# Altium PCB Main.PcbDoc
Units mm, origin at the board's own origin, x right, y up, seen from the top; angles counter-clockwise.
Board outline 46.61 x 26.29 mm, 2 copper layers (Top Layer, Bottom Layer); 17 components, 12 nets, 45 pads, 2 vias.
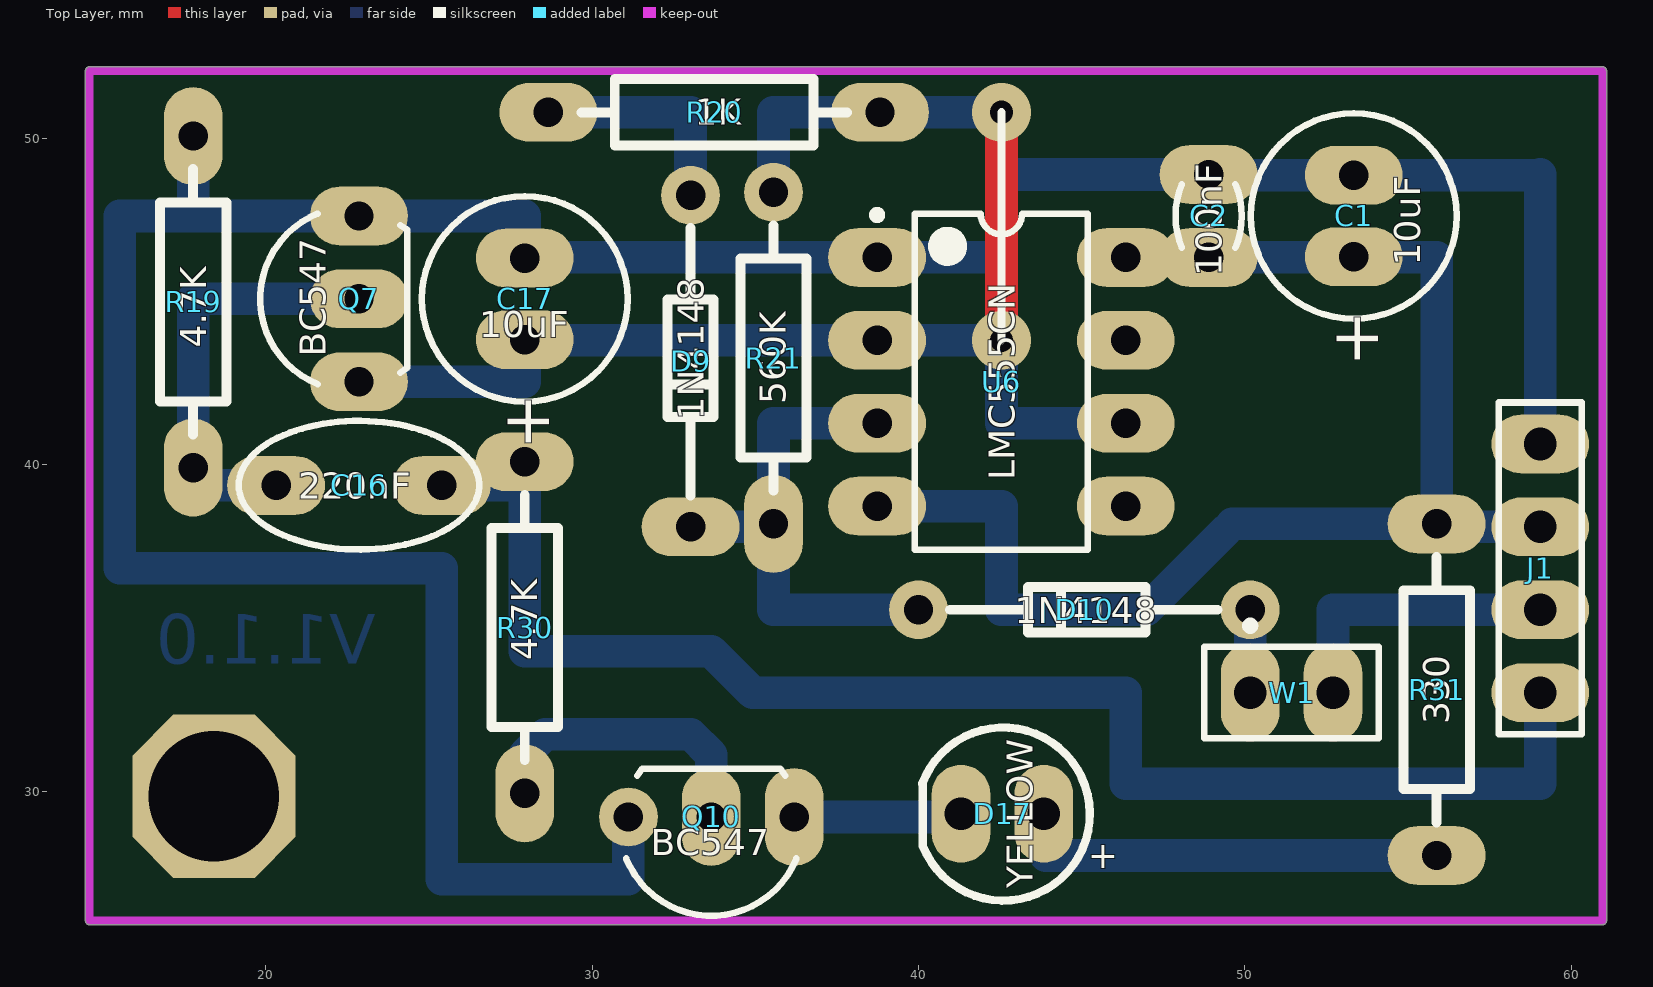
[diagram p0: Top Layer view]
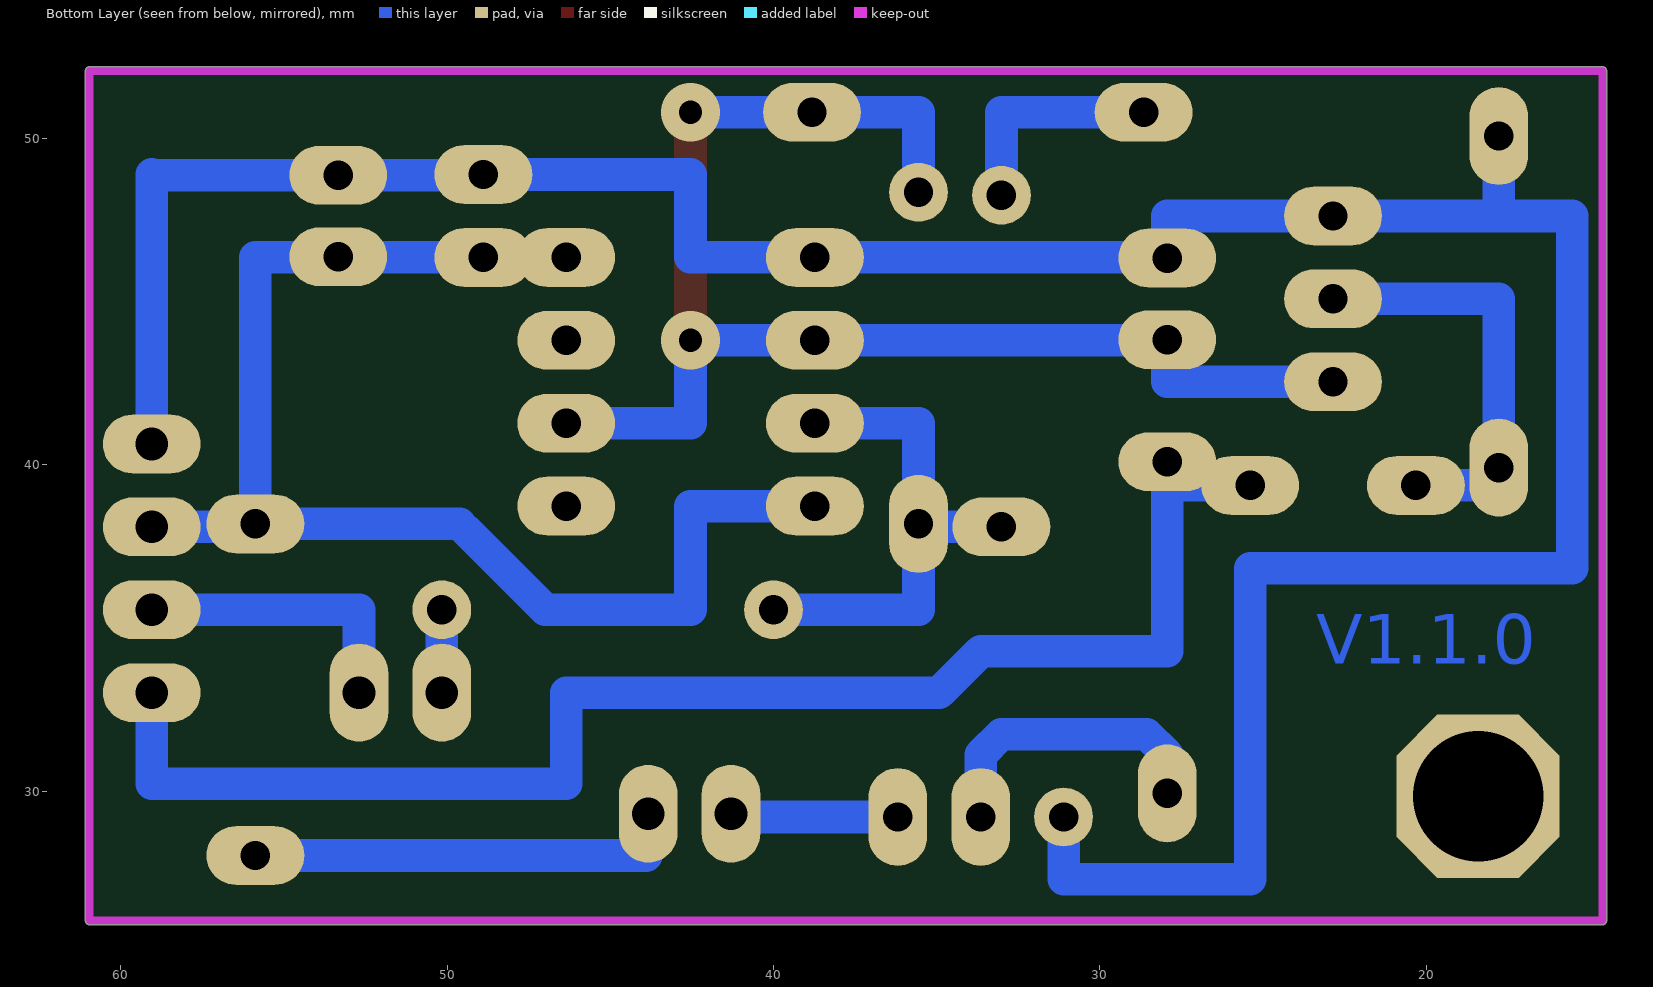
[diagram p1: Bottom Layer view, seen from below]

## Layer stack, top to bottom
Top Solder: solder mask 0.0102, Solder Resist, Dk 3.5
Top Layer: signal copper 0.0356
Dielectric 1: dielectric 0.32, FR-4, Dk 4.8
Bottom Layer: signal copper 0.0356
Bottom Solder: solder mask 0.0102, Solder Resist, Dk 3.5

## Board outline
14.605,25.908 cw(c14.605,26.035) 14.478,26.035 14.478,52.07 cw(c14.605,52.07) 14.605,52.197 60.96,52.197 cw(c60.96,52.07) 61.087,52.07 61.087,26.035 cw(c60.96,26.035) 60.96,25.908

## Design rules (kind name [scope] priority, off if disabled: settings)
Clearance [All] p1: gap=0.3
ComponentClearance [All] p1 off: gap=0 collisioncheckmode=3 verticalgap=0 showdistances=FALSE
Height [All] p1: minheight=0 maxheight=50 prefheight=12.7
PolygonConnect [All] p1: connectstyle=Relief reliefconductorwidth=0.254 reliefentries=4 polygonreliefangle="90 Angle" airgapwidth=0.254
RoomDefinition Main1 [InComponentClass('Main1')] p1: confinementstyle=ConfineIn formatcopy=TRUE lockcomponents=FALSE outline 21.565,30.734 49.759,30.734 49.759,48.006 21.565,48.006
RoutingVias [All] p1: holewidth=0.711 width=1.27 viastyle="Through Hole" minholewidth=0.711 minwidth=1.27 maxholewidth=0.711 maxwidth=1.27
SolderMaskExpansion [All] p1: expansion=0.102
Width [All] p1: maxlimit=0.5 minlimit=0.3 preferedwidth=0.3
28 further rules are at their usual default settings.

## Components (designator, comment, footprint, x,y, rotation, side; value= is the part's Value field where it differs from the comment)
C1 "10uF" CAPPR2.5-6.3x5 53.34,47.625 r90 top
C2 "100nF" CAPNTO2.54-3.56x2.03 48.895,47.625 r270 top
C16 "220nF" CAPNTO5.08-7.37x3.94 22.86,39.37 r180 top
C17 "10uF" CAPPR2.5-6.3x5 27.94,45.085 r90 top
D9 "1N4148" DIODE0.4_Glass#1 33.02,43.18 r270 top
D10 "1N4148" DIODE0.4_Glass#2 45.085,35.56 r180 top
D17 "YELLOW" LED-5mm_Red 42.545,29.21 r180 top
J1 "4PIN" HDR1X4 59.055,40.64 r270 top
Q7 "BC547" TO92C#1 22.86,45.085 r180 top
Q10 "BC547" TO92C#2 33.655,29.21 r270 top
R19 "4.7K" AXIAL-0.4#1 17.78,43.815 r90 top
R20 "1K" AXIAL-0.4#1 34.925,50.8 r180 top
R21 "560K" AXIAL-0.4#2 35.56,44.45 r270 top
R30 "4.7K" AXIAL-0.4#3 27.94,36.195 r270 top
R31 "330" AXIAL-0.4#4 55.88,34.29 r270 top
U6 "LMC555CN" N08E 42.545,42.545 r0 top
W1 "Jumper" PIN2 50.165,33.02 r0 top

## Footprints (in the part's own frame and the unit in brackets; to place one, negate y for a bottom-side part, rotate by r counter-clockwise, add the part's x,y. Pads: shape width x height; smd on the part's side, far side on the other; paste and mask are expansions set on the pad)
AXIAL-0.4#1 [mm]
  oval 3x1.8 hole 0.9: 1(-3.9,0) 2(6.26,0)
  silkscreen extent -2.88,-1.02 5.24,1.02, body extent -4.19,-1.19 6.58,1.12, height 3.51
AXIAL-0.4#2 [mm]
  round 1.8 hole 0.9: 1(-3.9,0)
  oval 3x1.8 hole 0.9: 2(6.26,0)
  silkscreen extent -2.88,-1.02 5.24,1.02, body extent -4.19,-1.19 6.58,1.12, height 3.51
AXIAL-0.4#3 [mm]
  oval 1.8x3 hole 0.9: 1(-3.9,0)
  oval 3x1.8 hole 0.9: 2(6.26,0)
  silkscreen extent -2.88,-1.02 5.24,1.02, body extent -4.19,-1.19 6.58,1.12, height 3.51
AXIAL-0.4#4 [mm]
  oval 1.8x3 hole 0.9: 1(-3.9,0) 2(6.26,0)
  silkscreen extent -2.88,-1.02 5.24,1.02, body extent -4.19,-1.19 6.58,1.12, height 3.51
CAPNTO2.54-3.56x2.03 [mm] "Capacitor, Radial, Tantalum, Non-Polarised; Body 3.56 x 2.03 x 5.08 mm (WxTxH max); Pin Spacing 2.54 mm (typ)"
  oval 1.8x3 hole 0.9: 1(-1.27,0) 2(1.27,0)
  silkscreen extent -0.98,-1.02 0.98,1.02
CAPNTO5.08-7.37x3.94 [mm] "Capacitor, Radial, Tantalum, Non-Polarised; Body 7.37 x 3.94 x 6.86 mm (WxTxH max); Pin Spacing 5.08 mm (typ)"
  oval 3x1.8 hole 0.9: 1(-2.54,0) 2(2.54,0)
  silkscreen extent -3.68,-1.98 3.68,1.96
CAPPR2.5-6.3x5 [mm] "Capacitor, Electrolytic, Radial; Body 6.3 x 5 mm (Dia.xH typ); Pin Spacing 2.5 mm (typ)"
  oval 1.8x3 hole 0.9: 1(-1.25,0) 2(1.25,0)
  silkscreen extent -3.15,-3.15 3.15,3.15
DIODE0.4_Glass#1 [mm] "created by: M.Hariri (designer)"
  round 1.8 hole 0.9: 1(-5.08,0)
  oval 1.8x3 hole 0.9: 2(5.08,0)
  silkscreen extent -4.08,-0.7 4.12,0.7
DIODE0.4_Glass#2 [mm] "created by: M.Hariri (designer)"
  round 1.8 hole 0.9: 1(-5.08,0) 2(5.08,0)
  silkscreen extent -4.08,-0.7 4.12,0.7
HDR1X4 [mm]
  oval 1.8x3 hole 1: 1(0,0) 2(2.54,0) 3(5.08,0) 4(7.62,0)
  silkscreen extent -1.27,-1.27 8.89,1.27
LED-5mm_Red [mm]
  oval 1.8x3 hole 1: 1(-1.3,-0.1) 2(1.24,-0.1)
  silkscreen extent -2.71,-2.74 2.43,2.56, body extent -2.6,-2.64 2.48,2.46, height 9.6
N08E [mm] "DIP, 8-Leads, Row Spacing 7.62mm, Pitch 2.54mm, Body 9.91x6.35mm"
  oval 3x1.8 hole 0.9: 1(-3.81,3.81) 2(-3.81,1.27) 3(-3.81,-1.27) 4(-3.81,-3.81) 5(3.81,-3.81) 6(3.81,-1.27) 7(3.81,1.27) 8(3.81,3.81)
  silkscreen extent -3.93,-5.15 2.65,5.23, body extent -3.6,-5.15 3.6,5.15, height 5.34
PIN2 [mm]
  oval 1.8x3 hole 1: 1(0,0) 2(2.54,0)
  silkscreen extent -1.4,-1.4 3.94,2.17
TO92C#1 [mm]
  oval 3x1.8 hole 0.9: 1(0,2.54) 2(0,0) 3(0,-2.54)
  silkscreen extent -1.48,-2.61 3.02,2.61, body extent -1.52,-2.79 2.68,2.79, height 8
TO92C#2 [mm]
  oval 3x1.8 hole 0.9: 1(0,2.54) 2(0,0)
  round 1.8 hole 0.9: 3(0,-2.54)
  silkscreen extent -1.48,-2.61 3.02,2.61, body extent -1.52,-2.79 2.68,2.79, height 8

## Part data
C1 C17: library part "Cap Pol1", "Polarized Capacitor (Radial)"
C2 C16: library part Cap, "Capacitor"
D9 D10: library part Diode, "Default Diode"
D17: library part LED, "Typical INFRARED GaAs LED"
J1: library part "Header 4", "Header, 4-Pin"
Q7 Q10: library part NPN, "NPN Bipolar Transistor"
R19 R20 R21 R30 R31: library part Res1, "Resistor"
U6: "CMOS Timer, 8-pin MDIP"
W1: library part "Jumper 2pin_2", "Jumper Wire"

## Free pads (board coordinates)
  oct 5x5 hole 4: 0(18.415,29.845)

## Via types
v1: diameter 1.8, hole 0.711, Top Layer to Bottom Layer, 2 vias

## Nets (pads, with @x,y where several pads share a name; then routed paths per layer and width w, separated by ;. In a path a pad name is that pad's centre, name@x,y a point inside that pad or via, vN(x,y) a via of type N, cw(c..) or ccw(c..) an arc to the next point about the centre after c; other vN are vias at no path point)
5V: C1.1 C2.2 J1.2 R31.1 U6.4 U6.8 | length 43.7
  Bottom Layer w1: U6.4 42.545,38.735 42.545,35.56 46.99,35.56 49.403,37.973 ; U6.8 C2.2 ; 49.62,38.19 R31.1 ; 50.546,46.355 C2.2 ; J1.2 55.88,38.1 R31.1 ; C2.2 55.88,46.355 R31.1
GND: C1.2 C2.1 C17.2 J1.1 Q7.3 Q10.3 R19.2 U6.1 | length 95.9
  Bottom Layer w1: R19.2 17.78,47.625 ; C17.2 27.94,47.625 Q7.3 17.78,47.625 ; C17.2@27.96,46.355 U6.1 42.545,46.355 42.545,48.895 C2.1 48.915,48.875 C1.2 59.035,48.875 59.055,48.895 J1.1 ; Q10.3 31.115,27.305 25.4,27.305 25.4,36.83 15.532,36.83 15.532,47.625 17.78,47.625
NetC16_2: C16.2 Q7.2 R19.1 | length 13.3
  Bottom Layer w1: C16.2 17.78,39.37 17.78,45.085 Q7.2
NetC17_1: C17.1 Q7.1 R20.1 R21.1 U6.2 U6.6 | length 43.8
  Top Layer w1: v1(42.545,43.815) v1(42.545,50.8)
  Bottom Layer w1: Q7.1 27.94,42.545 C17.1 27.96,43.815 U6.2 v1(42.545,43.815) 42.545,41.275 U6.6 ; R21.1@35.56,48.26 35.56,50.8 R20.1 v1(42.545,50.8)
NetD9_1: D9.1 R20.2 | length 7
  Bottom Layer w1: R20.2@28.575,50.8 33.02,50.8 D9.1
NetD9_2: D9.2 D10.2 R21.2 U6.3 | length 15.9
  Bottom Layer w1: D9.2 R21.2@35.56,38.1 ; U6.3 35.56,41.275 35.56,35.56 D10.2
NetD10_1: D10.1 W1.1 | length 2.5
  Bottom Layer w1: W1.1 D10.1
NetD17_1: D17.1 R31.2 | length 13.3
  Bottom Layer w1: D17.1 43.905,29.25 43.905,28.03 R31.2
NetD17_2: D17.2 Q10.1 | length 5
  Bottom Layer w1: Q10.1 D17.2@41.205,29.21
NetQ10_2: Q10.2 R30.2 | length 9.3
  Bottom Layer w1: R30.2 27.94,31.115 28.575,31.75 33.02,31.75 33.655,31.115 Q10.2
OUT: J1.3 W1.2 | length 8.9
  Bottom Layer w1: W1.2 52.705,35.56 J1.3
RESET: C16.1 J1.4 R30.1 | length 45
  Bottom Layer w1: C16.1 27.85,39.37 27.94,39.46 27.94,34.29 33.655,34.29 34.925,33.02 46.355,33.02 46.355,30.226 59.055,30.226 J1.4
pads on no net: U6.5 U6.7

## Keep-outs
Keep-Out Layer:
  lines w0.254: 14.605,26.035 60.96,26.035 60.96,52.07 14.605,52.07 14.605,26.035

## Other copper
Bottom Layer:
  text "V1.1.0" at 23.368,33.909 h1.52

## Silkscreen, mask and mechanical layers (free items; w line width, h text height)
Top Overlay:
  lines w0.254: 42.545,43.815 42.545,50.8

## Text inside footprints (layer, text, board x,y; h text height)
C1: Top Overlay "+" at 54.09,43 h1.5 r90
C17: Top Overlay "+" at 28.69,40.46 h1.5 r90
D17: Top Overlay "+" at 46.131,28.345 h0.8 r180